# Altium PCB Button Bridge.PcbDoc
Units mm, origin at the board's own origin, x right, y up, seen from the top; angles counter-clockwise.
Board outline 30 x 45 mm, 4 copper layers (Top Layer, Layer 2, Layer 3, Bottom Layer), stack 1.533 mm thick; 12 components, 18 nets, 73 pads, 13 vias.
Unrouted connection lines stored in the file: 40.
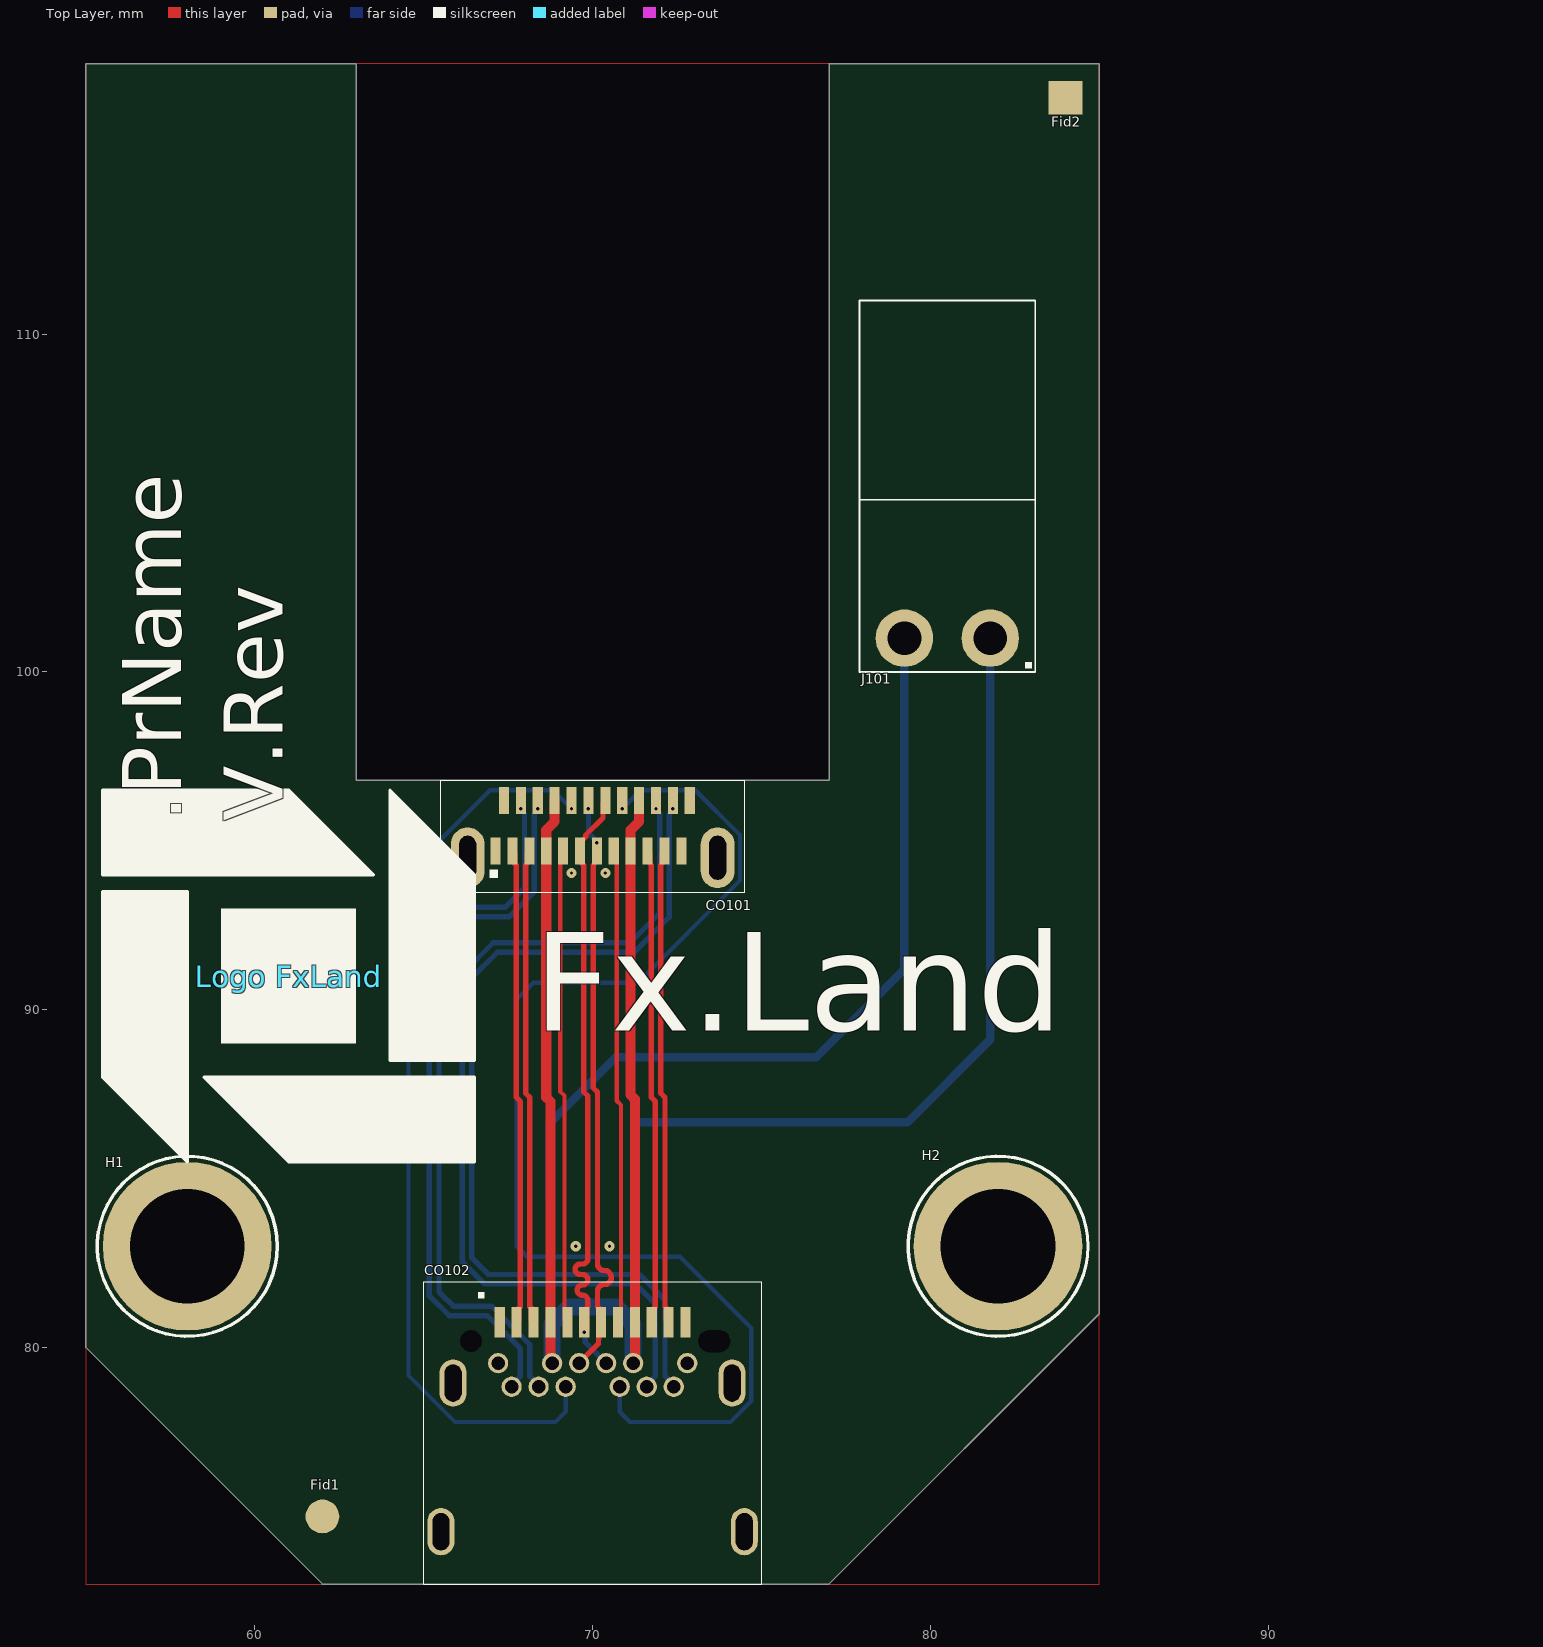
[diagram p0: Top Layer view]
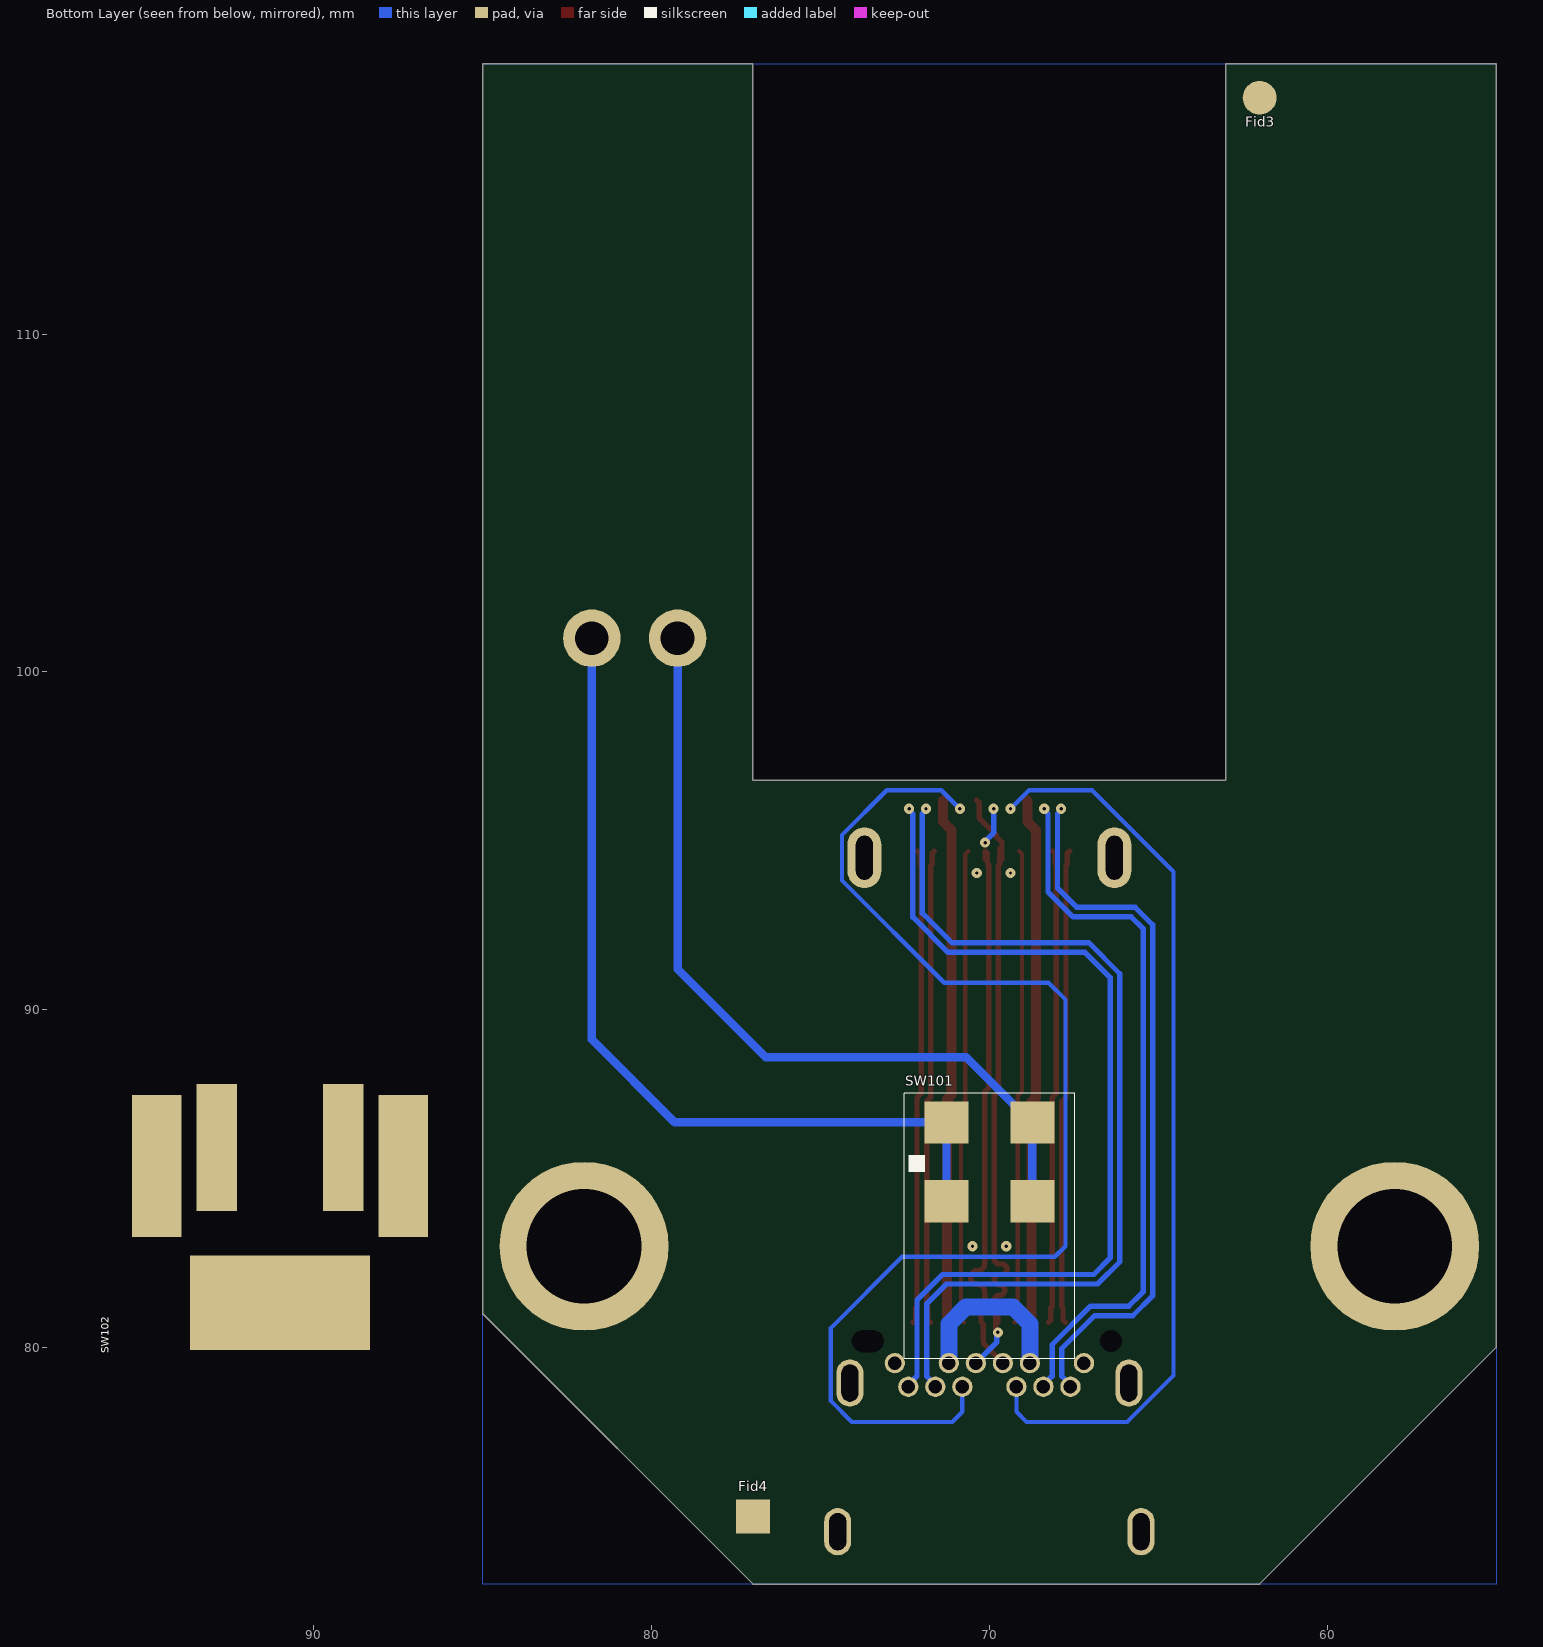
[diagram p1: Bottom Layer view, seen from below]
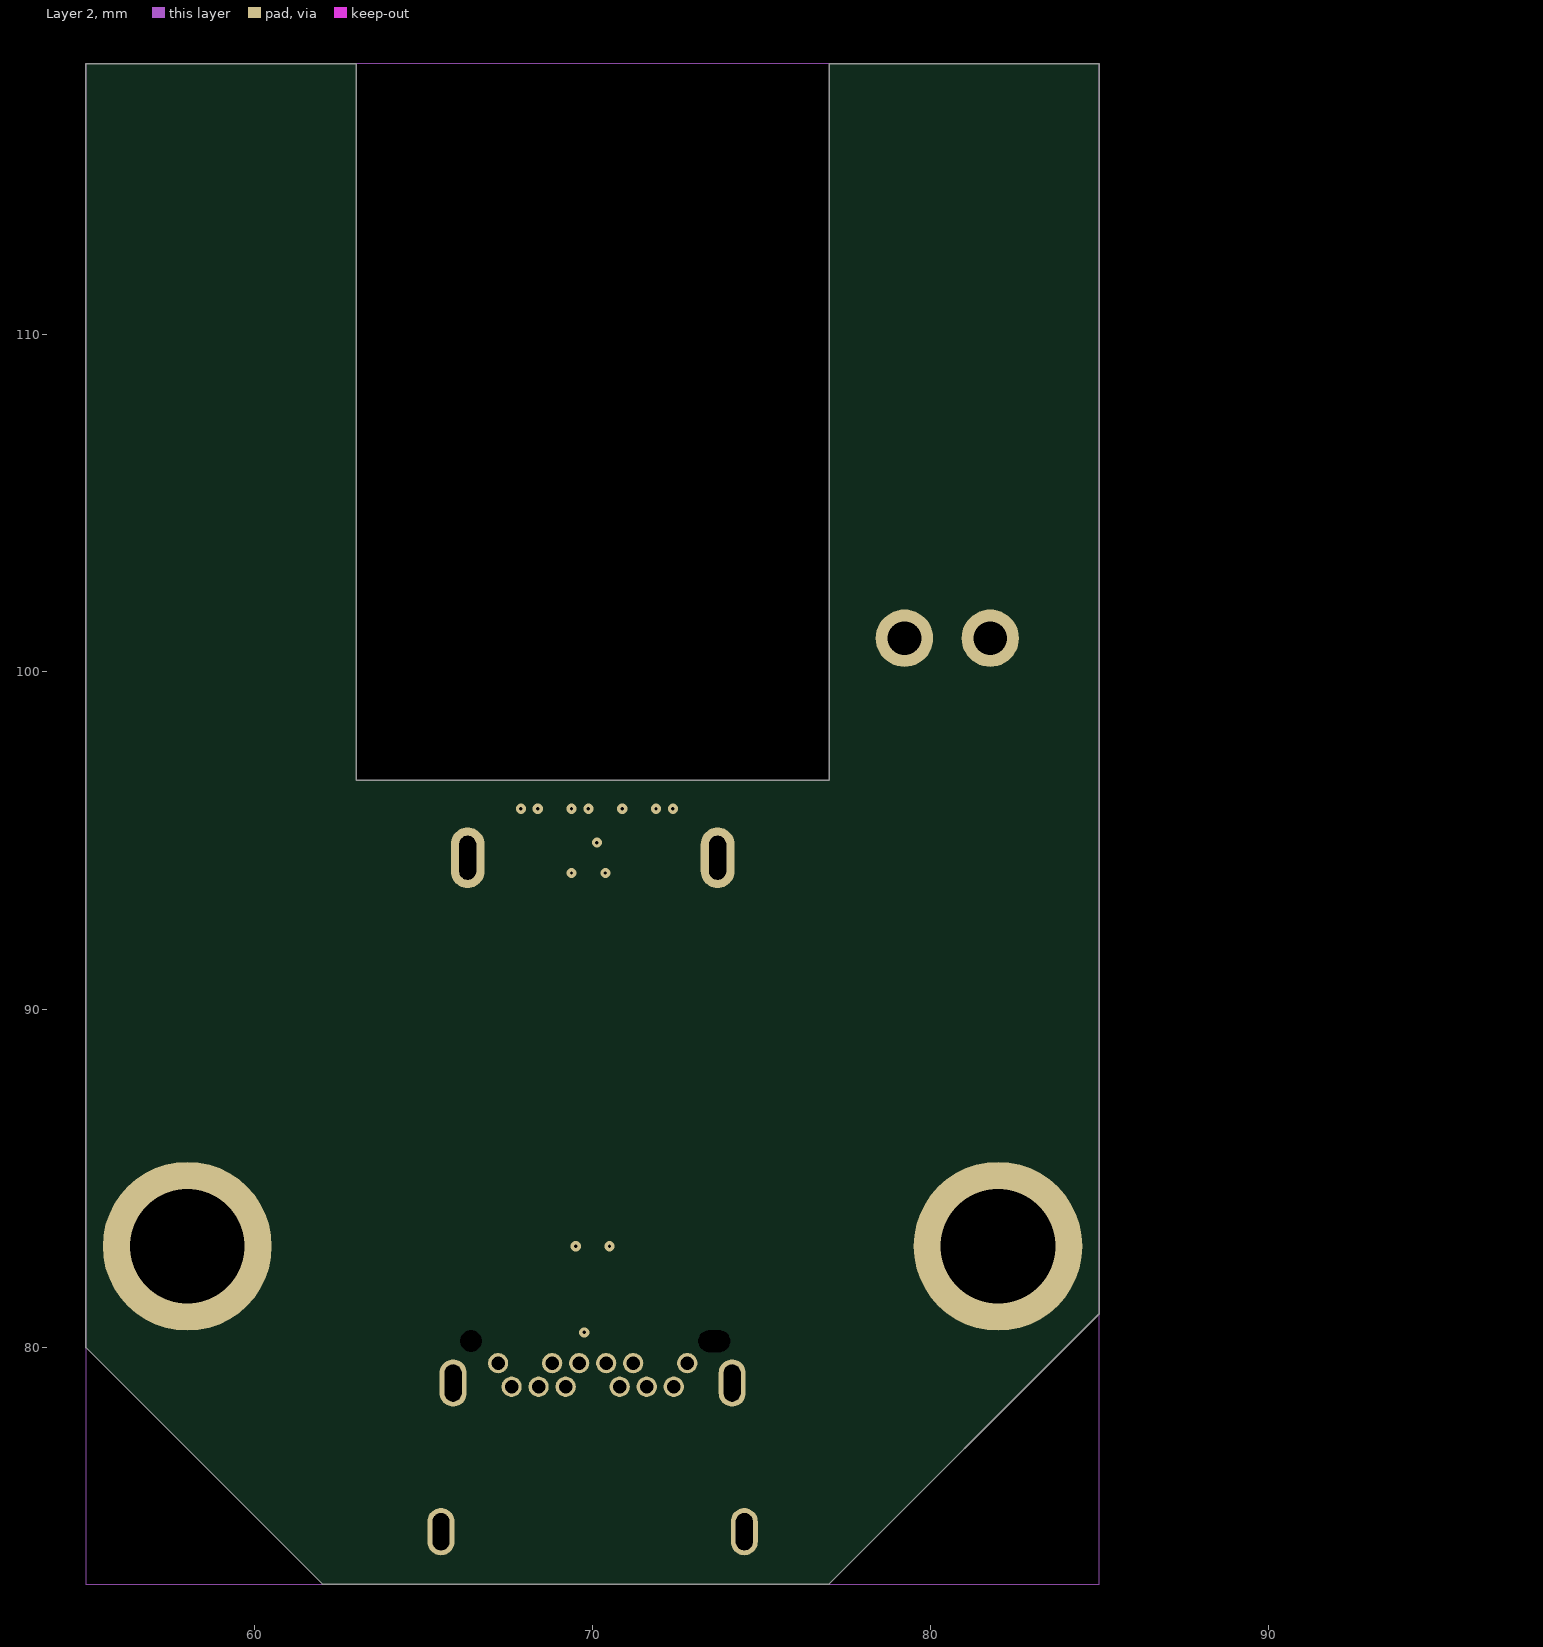
[diagram p2: Layer 2]
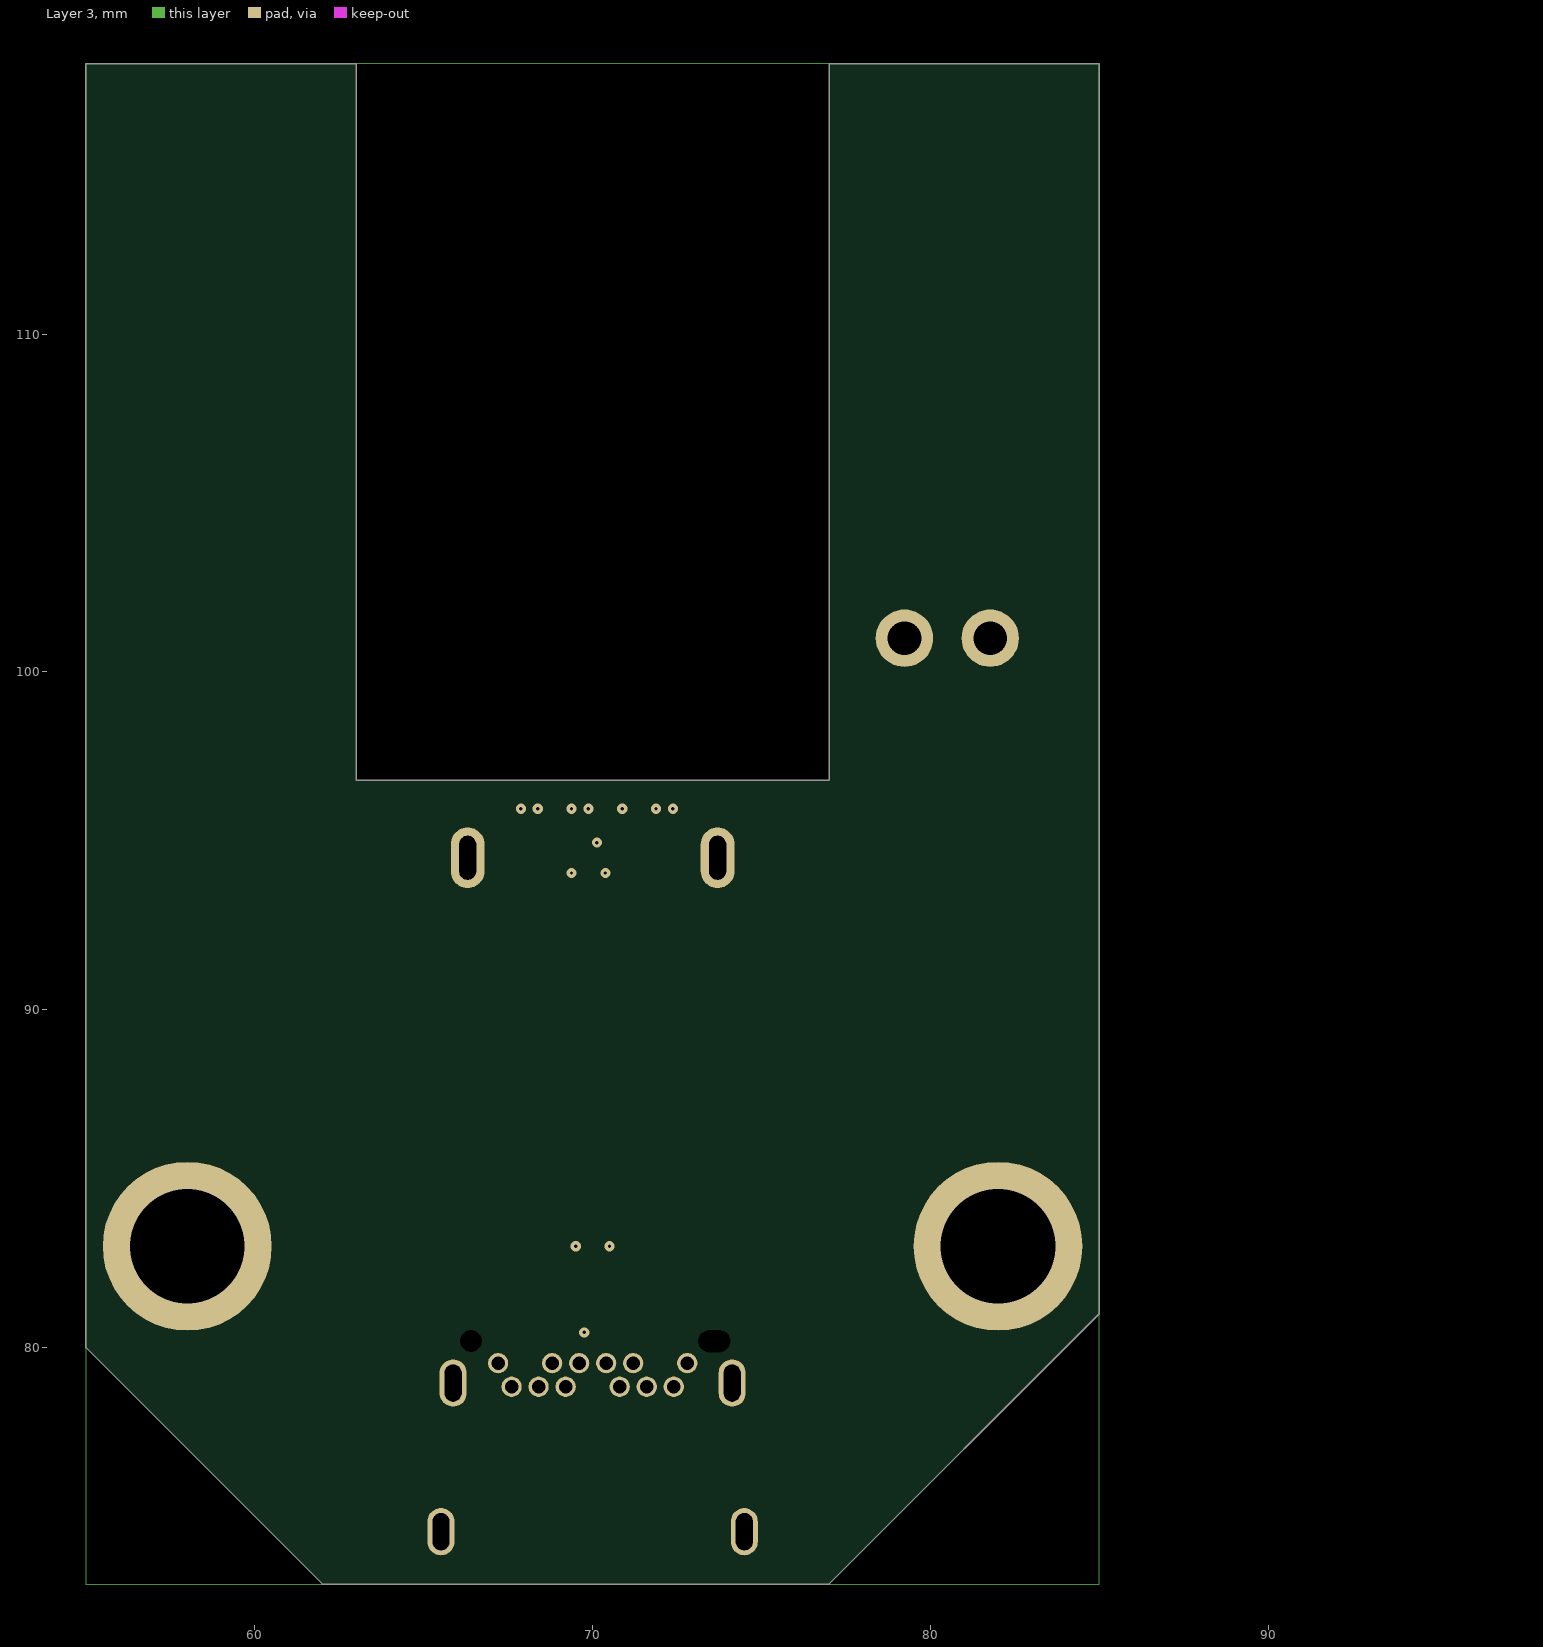
[diagram p3: Layer 3]

## Layer stack, top to bottom
Top Solder: solder mask 0.0102, Solder Resist, Dk 3.5
Top Layer: signal copper 0.035
Dielectric 1: prepreg 0.1168, PP-016, Dk 4.4
Layer 2: signal copper 0.018
Dielectric 2.1: core 0.2032, Core-024, Dk 4.6
Dielectric 2.2: core 0.7874, Core-040, Dk 4.6
Dielectric 2.3: core 0.2032, Core-024, Dk 4.6
Layer 3: signal copper 0.018
Dielectric 3: prepreg 0.1168, PP-016, Dk 4.4
Bottom Layer: signal copper 0.035
Bottom Solder: solder mask 0.0102, Solder Resist, Dk 3.5

## Board outline
62,73 55,80 55,95 55,118 63,118 63,96.8 77,96.8 77,118 85,118 85,81 77,73

## Design rules (kind name [scope] priority, off if disabled: settings)
BoardOutlineClearance BoardOutlineClearanceText [OnLayer('Top Overlay')   or        OnLayer('Bottom Overlay')] p1: gap=0 ignorepadtopadclearanceinfootprint=FALSE
BoardOutlineClearance BoardOutlineClearanceTopBot [OnLayer('Top Layer') or OnLayer('Bottom Layer')] p2: gap=0.155 ignorepadtopadclearanceinfootprint=FALSE
BoardOutlineClearance [All] p3: gap=0.155 ignorepadtopadclearanceinfootprint=FALSE except(0: Arc-SplitBarrior Arc-SplitContinuation Track-SplitBarrior Track-SplitContinuation SMDPad-SplitBarrior SMDPad-SplitContinuation THPad-SplitBarrior THPad-SplitContinuation Via-SplitBarrior Via-SplitContinuation Fill-SplitBarrior Fill-SplitContinuation Poly-SplitBarrior Poly-SplitContinuation Region-SplitBarrior Region-SplitContinuation Text-SplitBarrior Text-SplitContinuation)
Clearance Clearance_DiffPair [(InDifferentialPairClass('All Differential Pairs'))] p1: gap=0.1 ignorepadtopadclearanceinfootprint=TRUE except(0: Arc-Text Track-Text SMDPad-Text THPad-Text Via-Text Fill-Text Poly-Text Region-Text Text-Text Text-Hole)
Clearance Clearance_HighPWR [InNet('USB_5V')] p2: gap=0.2 ignorepadtopadclearanceinfootprint=TRUE except(0: Arc-Text Track-Text SMDPad-Text THPad-Text Via-Text Fill-Text Poly-Text Region-Text Text-Text Text-Hole)
Clearance Clearance_DiffNets [All] p3: gap=0.1 ignorepadtopadclearanceinfootprint=TRUE except(0: Arc-Text Track-Text SMDPad-Text THPad-Text Via-Text Fill-Text Poly-Text Region-Text Text-Text Text-Hole)
Clearance Clearance_SameNets [All] p4: gap=0 ignorepadtopadclearanceinfootprint=FALSE
ComponentClearance [All] p1: gap=0 collisioncheckmode=3 verticalgap=0 showdistances=FALSE
DiffPairsRouting DiffPairsRouting_USB3 [InDifferentialPairClass('USB3')] p1: maxlimit=0.2 minlimit=0.125 mostfreqgap=0.2 toplayer_maxgap=0.125 toplayer_prefgap=0.125 toplayer_minwidth=0.159 toplayer_maxwidth=0.159 toplayer_prefwidth=0.159 bottomlayer_maxgap=0.125 bottomlayer_prefgap=0.125 bottomlayer_minwidth=0.159 bottomlayer_maxwidth=0.159 bottomlayer_prefwidth=0.159 impedanceprofiledriven=TRUE impedanceprofileid={AD4792B0-214B-4EB5-AFE0-71F60B3785FD} impedanceprofilevalue=90.000000 filterlayerstackid={D35C46F4-2E52-4D90-A27E-1B933197D4E5} maxuncoupledlength=12.7
DiffPairsRouting DiffPairsRouting_USB [InDifferentialPairClass('USB')] p2: maxlimit=0.2 minlimit=0.125 mostfreqgap=0.2 toplayer_maxgap=0.125 toplayer_prefgap=0.125 toplayer_minwidth=0.159 toplayer_maxwidth=0.159 toplayer_prefwidth=0.159 bottomlayer_maxgap=0.125 bottomlayer_prefgap=0.125 bottomlayer_minwidth=0.159 bottomlayer_maxwidth=0.159 bottomlayer_prefwidth=0.159 impedanceprofiledriven=TRUE impedanceprofileid={AD4792B0-214B-4EB5-AFE0-71F60B3785FD} impedanceprofilevalue=90.000000 filterlayerstackid={D35C46F4-2E52-4D90-A27E-1B933197D4E5} maxuncoupledlength=12.7
Height [All] p1: minheight=0 maxheight=100 prefheight=12.7
HoleSize [All] p1: absolutevalues=TRUE maxlimit=20 minlimit=0.025 maxpercent=80.000 minpercent=20.000
HoleToHoleClearance [All] p1: gap=0.1 allowstackedmicrovias=TRUE
MatchedLengths MatchedLengthsUSB3 [InDifferentialPairClass('USB3')] p1: tolerance=0.127 checknetsindiffpair=TRUE checkdiffpairvsdiffpair=FALSE checkxsignals=FALSE checkothers=FALSE
MinimumAnnularRing [All] p1: minimumring=0.1
MinimumSolderMaskSliver [All] p1: minsoldermaskwidth=0
PolygonConnect PolygonConnect_GND [InNet('GND')] p1: thpad.connectstyle=Relief thpad.reliefconductorwidth=0.35 thpad.reliefentries=4 thpad.polygonreliefangle="90 Angle" thpad.airgapwidth=0.15 smdpad.connectstyle=Relief smdpad.reliefconductorwidth=0.2 smdpad.reliefentries=4 smdpad.polygonreliefangle="90 Angle" smdpad.airgapwidth=0.075 via.connectstyle=Direct via.reliefconductorwidth=0.5 via.reliefentries=4 via.polygonreliefangle="90 Angle" via.airgapwidth=0.254
PolygonConnect [All] p2: connectstyle=Relief reliefconductorwidth=0.254 reliefentries=4 polygonreliefangle="90 Angle" airgapwidth=0.254
RoutingVias RoutingVias_DiffPair [InDifferentialPairClass('All Differential Pairs')] p1: holewidth=0.1 width=0.3 viastyle="Through Hole" minholewidth=0.1 minwidth=0.3 maxholewidth=0.35 maxwidth=0.6
RoutingVias [All] p2: holewidth=0.1 width=0.3 viastyle="Through Hole" minholewidth=0.1 minwidth=0.3 maxholewidth=6.3 maxwidth=6.9
SilkToSilkClearance [All] p1: silktosilkclearance=0
SilkToSolderMaskClearance [IsPad] p1: minsilkscreentomaskgap=0 clearancetoexposedcopper=TRUE
SolderMaskExpansion [All] p1: expansion=0.102 istentingtop=FALSE
UnRoutedNet [All] p1: checkbadconnections=TRUE
Width [All] p1: maxlimit=20 minlimit=0.1 preferedwidth=0.125
21 further rules are at their usual default settings.

## Classes and differential pairs
differential pair class USB3: USB USB_RX1 USB_RX2 USB_TX1 USB_TX2
component class Connections: CO101 CO102 J101 SW101 SW102
component class 001_OverViewMainHub-part3: Fid1 Fid2 Fid3 Fid4 H1 H2 "Logo FxLand"
differential pair USB: +USB_P -USB_N
differential pair USB_TX2: +USB_TX2_P -USB_TX2_N
differential pair USB_TX1: +USB_TX1_P -USB_TX1_N
differential pair USB_RX2: +USB_RX2_P -USB_RX2_N
differential pair USB_RX1: +USB_RX1_P -USB_RX1_N

## Components (designator, comment, footprint, x,y, rotation, side; value= is the part's Value field where it differs from the comment)
CO101 "USB4155" USB4155-03-C 70,96.8 r180 top locked
CO102 "USB4056" USB4056-03-A 70,74.55 r0 top locked
Fid1 "Fiducial" FidR_1.0mm 62,75 r0 top locked
Fid2 "Fiducial" FidS_1.0mm 84,117 r0 top locked
Fid3 "Fiducial" FidR_1.0mm 62,117 r180 bottom locked
Fid4 "Fiducial" FidS_1.0mm 77,75 r180 bottom locked
H1 "Hole M3" HOLE_M3 58,83 r0 top locked
H2 "Hole M3" HOLE_M3 82,83 r0 top locked
J101 "Header Angled" 1X2P_Angled_2.54mm 80.5,101 r180 top locked
"Logo FxLand" "FxLand" Logo_FxLand_3 61,91 r0 top
SW101 "7914" 7914S 70,85.5 r180 bottom locked
SW102 "TA3" TA3 91,82.34 r0 bottom

## Footprints (in the part's own frame and the unit in brackets; to place one, negate y for a bottom-side part, rotate by r counter-clockwise, add the part's x,y. Pads: shape width x height; smd on the part's side, far side on the other; paste and mask are expansions set on the pad)
1X2P_Angled_2.54mm [mm]
  round 1.7 hole 1: 1(-1.27,0) 2(1.27,0)
  silkscreen extent -2.6,-10 2.6,1, body extent -2.54,-9.93 2.54,0.29, height 2.47
7914S [mm]
  rect 1.3x1.25 smd: 1(-1.27,-1.165) 2(-1.27,1.165) 3(1.27,1.165) 4(1.27,-1.165)
  silkscreen extent -2.52,-5.82 2.53,2.03, body extent -2.52,-5.83 2.52,2.02, height 5.43
FidR_1.0mm [mm]
  round 1 smd: 1(0,0)
FidS_1.0mm [mm]
  rect 1x1 smd: 1(0,0)
HOLE_M3 [mm]
  round 5 hole 3.4: 1(0,0)
  silkscreen extent -2.66,-2.66 2.67,2.66
Logo_FxLand_3 [mm]
  silkscreen extent -5.5,-5.5 5.5,5.5
TA3 [mm]
  rect 1.205x3.76 smd: 1(-1.873,-3.58) 2(1.873,-3.58)
  rect 1.46x4.19 smd: 3(-3.65,-3.035) 3(3.65,-3.035)
  rect 5.33x2.79 smd: 3(0,1.015)
USB4056-03-A [mm]
  round 0 hole 0.65: 0(-3.6,5.64)
  round 0 hole 0.65 slot 0.95 at 0 deg: 0(3.6,5.64)
  rect 0.3x0.9 smd: 1(-2.75,6.2) 2(-2.25,6.2) 3(-1.75,6.2) 4(-1.25,6.2) 5(-0.75,6.2) 6(-0.25,6.2) 7(0.25,6.2) 8(0.75,6.2) 9(1.25,6.2) 10(1.75,6.2) 11(2.25,6.2) 12(2.75,6.2)
  round 0.6 hole 0.4: 21(2.8,4.99) 22(2.4,4.29) 23(1.6,4.29) 24(1.2,4.99) 25(0.8,4.29) 26(0.4,4.99) 27(-0.4,4.99) 28(-0.8,4.29) 29(-1.2,4.99) 30(-1.6,4.29) 31(-2.4,4.29) 32(-2.8,4.99)
  oval 0.8x1.4 hole 0.5 slot 1.1 at 90 deg: SH(-4.49,0) SH(-4.13,4.4) SH(4.13,4.4) SH(4.49,0)
  silkscreen extent -5,-1.55 5,7.4, body extent -4.91,-2.53 4.94,7.34, height 3.33
USB4155-03-C [mm]
  rect 0.3x0.8 smd: 1(2.875,2.1) 2(2.375,2.1) 3(1.875,2.1) 4(1.375,2.1) 5(0.875,2.1) 6(0.375,2.1) 7(-0.125,2.1) 8(-0.625,2.1) 9(-1.125,2.1) 10(-1.625,2.1) 11(-2.125,2.1) 12(-2.625,2.1) 21(-2.875,0.6) 22(-2.375,0.6) 23(-1.875,0.6) 24(-1.375,0.6) 25(-0.875,0.6) 26(-0.375,0.6) 27(0.125,0.6) 28(0.625,0.6) 29(1.125,0.6) 30(1.625,0.6) 31(2.125,0.6) 32(2.625,0.6)
  oval 1x1.8 hole 0.5 slot 1.3 at 90 deg: SH(-3.7,2.3) SH(3.7,2.3)
  silkscreen extent -4.5,0 4.5,3.33, body extent -4.4,-12.75 4.4,2.75, height 1.6

## Part data
CO101: library part CO0031, "USB C connector Plug Horizontal", ID=30, ManfactPart=USB4155-03-C, Part Number=CO0031, RefVal=USB4155
CO102: library part CO0030, "USB C connector Receptacle Horizontal", ID=29, ManfactPart=USB4056-03-A, Part Number=CO0030, RefVal=USB4056
Fid1 Fid3: library part ME0011, "Fiducial Round 1mm", ID=11, Part Number=ME0011, RefVal=Fiducial
Fid2 Fid4: library part ME0012, "Fiducial Sqaure 1mm", ID=12, Part Number=ME0012, RefVal=Fiducial
H1 H2: library part ME0001, "Mounting Hole M3", ID=1, Part Number=ME0001, RefVal="Hole M3"
J101: library part CO0057, "Header Angled 1x2P", ID=57, ManfactPart=10129379-902001BLF, Part Number=CO0057, RefVal="Header Angled"
"Logo FxLand": library part ME0008, "Logo FxLand 3", ID=8, Part Number=ME0008, RefVal=FxLand
SW101: library part SW0004, "Tactile Switch Key Switch Right Angle", ID=4, ManfactPart=7914S-1-050E, Part Number=SW0004, RefVal=7914
SW102: library part SW0006, "Tactile Switch Right Angle", ID=6, ManfactPart=TA3-1W2-V-T/R, Part Number=SW0006, RefVal=TA3

## Via types
v1: diameter 0.3, hole 0.1, Top Layer to Bottom Layer, 13 vias

## Nets (pads, with @x,y where several pads share a name; then routed paths per layer and width w, separated by ;. In a path a pad name is that pad's centre, name@x,y a point inside that pad or via, vN(x,y) a via of type N, cw(c..) or ccw(c..) an arc to the next point about the centre after c; other vN are vias at no path point)
GND: CO101.1 CO101.12 CO101.21 CO101.32 CO101.SH CO102.1 CO102.12 CO102.21 CO102.32 CO102.SH H1.1 H2.1
  other v1: 69.5,83 70.5,83 69.375,94.05 70.375,94.05
NetJ101_1: J101.1 SW101.1 SW101.2 | length 25.7
  Bottom Layer w0.25: SW101.1 SW101.2 79.315,86.665 81.77,89.12 J101.1
NetJ101_2: J101.2 SW101.3 SW101.4 | length 24.5
  Bottom Layer w0.25: SW101.4 SW101.3 68.755,86.665 70.69,88.6 76.625,88.6 79.23,91.205 J101.2
USB_5V: CO101.4 CO101.9 CO101.24 CO101.29 CO102.4 CO102.9 CO102.24 CO102.29 | length 38.8
  Top Layer w0.3: CO102.29 68.75,79.59 CO102.4 68.75,87.288 68.625,87.413 CO101.4 68.625,95.325 68.875,95.575 CO101.29 ; CO102.24 71.25,79.59 CO102.9 71.25,87.353 71.125,87.478 CO101.9 71.125,95.325 71.375,95.575 CO101.24
  Bottom Layer w0.5: CO102.29 68.8,80.7 69.3,81.2 70.7,81.2 71.2,80.7 CO102.24
USB_CC1: CO101.5 CO102.5 | length 14.1
  Top Layer w0.125: CO101.5 69.038,94.613 69.038,87.583 69.163,87.458 69.163,80.837 CO102.5
USB_CC2: CO101.25 CO102.25 | length 36.1
  Bottom Layer w0.127: CO102.25 70.8,78.1 71.1,77.8 74.077,77.8 74.694,78.417 74.694,80.581 72.589,82.686 68.063,82.686 67.75,83 67.75,90.3 68.25,90.8 71.338,90.8 74.364,93.825 74.364,95.175 73.038,96.5 71.425,96.5 v1(70.875,95.95)
USB_N: CO101.7 CO101.27 CO102.7 CO102.27 | length 17.4
  Top Layer w0.15: CO101.7@70.125,94.45 CO101.7 ; CO102.7 CO102.7@70.25,81.05
  Top Layer w0.159: CO102.27 70.175,80.115 70.175,80.25 70.179,80.254 70.179,80.679 CO102.7 ; CO101.7 70.054,94.629 70.054,94.324 70.017,94.286 70.017,87.691 70.142,87.566 70.142,82.832 70.142,82.487 ccw(c70.348,82.487) 70.348,82.281 cw(c70.348,82.075) 70.348,81.868 ccw(c70.348,81.662) 70.142,81.662 70.142,81.214 70.179,81.176 70.179,81.17 70.179,81.121 CO102.7@70.25,81.05
  Bottom Layer w0.159: v1(69.875,95.95) 69.875,95.238 70.125,94.988 v1(70.125,94.95)
USB_P: CO101.6 CO101.26 CO102.6 CO102.26 | length 18.9
  Top Layer w0.15: CO101.6@69.625,94.45 CO101.6 CO101.6@69.7,94.775 ; CO102.6 CO102.6@69.75,81.05
  Top Layer w0.159: v1(69.75,80.45) 69.821,80.521 69.821,81.05 69.821,81.176 69.858,81.214 69.858,81.389 ccw(c69.699,81.389) 69.699,81.548 cw(c69.699,81.702) 69.545,81.702 cw(c69.699,81.702) 69.699,81.857 69.704,81.857 ccw(c69.704,82.011) 69.858,82.011 ccw(c69.704,82.011) 69.704,82.165 69.63,82.165 cw(c69.63,82.32) 69.476,82.32 cw(c69.63,82.32) 69.63,82.474 69.699,82.474 ccw(c69.699,82.633) 69.858,82.633 69.858,83.021 69.858,87.448 69.733,87.573 69.733,94.286 69.696,94.324 69.696,94.629 CO101.6 69.625,94.95 69.796,95.121 69.796,95.174 70.304,95.683 70.304,96.129 CO101.26
  Bottom Layer w0.159: v1(69.75,80.45) 69.777,80.423 69.777,80.163 CO102.26
USB_RX1_N: CO101.30 CO102.30 | length 21.2
  Bottom Layer w0.159: v1(68.375,95.95) 68.375,95.912 68.267,95.804 68.267,93.491 67.526,92.75 65.8,92.75 65.45,92.4 65.45,81.65 65.525,81.575 65.874,81.226 67.001,81.226 68.142,80.084 68.142,79.154 68.4,78.895 CO102.30
USB_RX1_P: CO101.31 CO102.31 | length 21.2
  Bottom Layer w0.159: CO102.31 67.6,78.895 67.858,79.154 67.858,79.967 66.883,80.942 65.757,80.942 65.166,81.532 65.166,92.518 65.682,93.034 67.409,93.034 67.983,93.608 67.983,95.804 67.875,95.912 v1(67.875,95.95)
USB_RX2_N: CO101.10 CO102.10 | length 14.1
  Top Layer w0.159: CO101.10 71.696,94.629 71.696,94.324 71.733,94.286 71.733,87.412 71.858,87.287 71.858,81.214 71.821,81.176 71.821,80.821 CO102.10
USB_RX2_P: CO101.11 CO102.11 | length 14.1
  Top Layer w0.159: CO101.11 72.054,94.629 72.054,94.324 72.017,94.286 72.017,87.529 72.142,87.404 72.142,81.214 72.179,81.176 72.179,80.821 CO102.11
USB_SBU1: CO101.8 CO102.8 | length 14.1
  Top Layer w0.125: CO101.8 70.713,94.613 70.713,87.307 70.837,87.182 70.837,80.837 CO102.8
USB_SBU2: CO101.28 CO102.28 | length 27.1
  Bottom Layer w0.127: CO102.28 69.2,78.1 68.9,77.8 65.923,77.8 64.55,79.173 64.55,94.088 66.962,96.5 68.825,96.5 v1(69.375,95.95)
USB_TX1_N: CO101.3 CO102.3 | length 14.1
  Top Layer w0.159: CO101.3 68.054,94.629 68.054,94.324 68.017,94.286 68.017,87.529 68.142,87.404 68.142,81.214 68.179,81.176 68.179,80.821 CO102.3
USB_TX1_P: CO101.2 CO102.2 | length 14.1
  Top Layer w0.159: CO101.2 67.696,94.629 67.696,94.324 67.733,94.286 67.733,87.412 67.858,87.287 67.858,81.214 67.821,81.176 67.821,80.821 CO102.2
USB_TX2_N: CO101.23 CO102.23 | length 27
  Bottom Layer w0.159: CO102.23 71.6,78.895 71.858,79.154 71.858,81.291 71.267,81.882 66.793,81.882 66.141,82.534 66.141,91.068 67.057,91.984 71.109,91.984 71.983,92.858 71.983,95.804 71.875,95.912 v1(71.875,95.95)
USB_TX2_P: CO101.22 CO102.22 | length 27
  Bottom Layer w0.159: v1(72.375,95.95) 72.375,95.912 72.267,95.804 72.267,92.741 71.226,91.7 67.175,91.7 66.425,90.95 66.425,82.651 66.911,82.165 71.385,82.165 72.142,81.408 72.142,79.154 72.4,78.895 CO102.22
pads on no net: CO102.0 Fid1.1 Fid2.1 Fid3.1 Fid4.1 SW102.1 SW102.2 SW102.3

## Polygon pours and split planes (outlines as drawn)
no net on Layer0 "Default Coverlay 2 Top" (split plane): 220,315 220,295 190,295 190,315
no net on Layer0 "Default Coverlay 2 Top" (split plane): 289,135 289,130 181,130 181,135
no net on Layer0 "Default Coverlay 2 Top" (split plane): 291,111 285,111 285,126 291,126
no net on Layer0 "Default Coverlay 2 Top" (split plane): 179,100 185,100 185,89 179,89
no net on Layer0 "Default Coverlay 2 Top" (split plane): 231,89 225,89 225,100 231,100
no net on Layer0 "Default Coverlay 2 Bottom" (split plane): 220,315 220,295 190,295 190,315
no net on Layer0 "Default Coverlay 2 Bottom" (split plane): 289,135 289,130 181,130 181,135
no net on Layer0 "Default Coverlay 2 Bottom" (split plane): 291,111 285,111 285,126 291,126
no net on Layer0 "Default Coverlay 2 Bottom" (split plane): 179,100 185,100 185,89 179,89
no net on Layer0 "Default Coverlay 2 Bottom" (split plane): 231,89 225,89 225,100 231,100
GND on Layer 2 "NONET_L02_P119" (solid, shelved, pour order 119): 55,73 85,73 85,118 55,118
GND on Layer 3 "NONET_L03_P118" (solid, shelved, pour order 118): 55,73 85,73 85,118 55,118
GND on Top Layer "NONET_L01_P120" (solid, shelved, pour order 120): 55,73 85,73 85,118 55,118
GND on Bottom Layer "NONET_L04_P117" (solid, shelved, pour order 117): 55,73 85,73 85,118 55,118

## Silkscreen, mask and mechanical layers (free items; w line width, h text height)
Top Overlay:
  text ".PrName / V.Rev" at 61.403,95.575 h3 r90
Board Shape:
  the board outline again, w0.025

## Text inside footprints (layer, text, board x,y; h text height)
"Logo FxLand": Top Overlay "Fx.Land" at 68.261,88.424 h5